# Altium PCB BaseCard.PcbDoc
Units mm, origin at the board's own origin, x right, y up, seen from the top; angles counter-clockwise.
Board outline 23 x 45 mm, 4 copper layers (Top Layer, Ground Plane, Power Plane, Bottom Layer), stack 0.844 mm thick; 2 components, 28 nets, 74 pads, 0 vias.
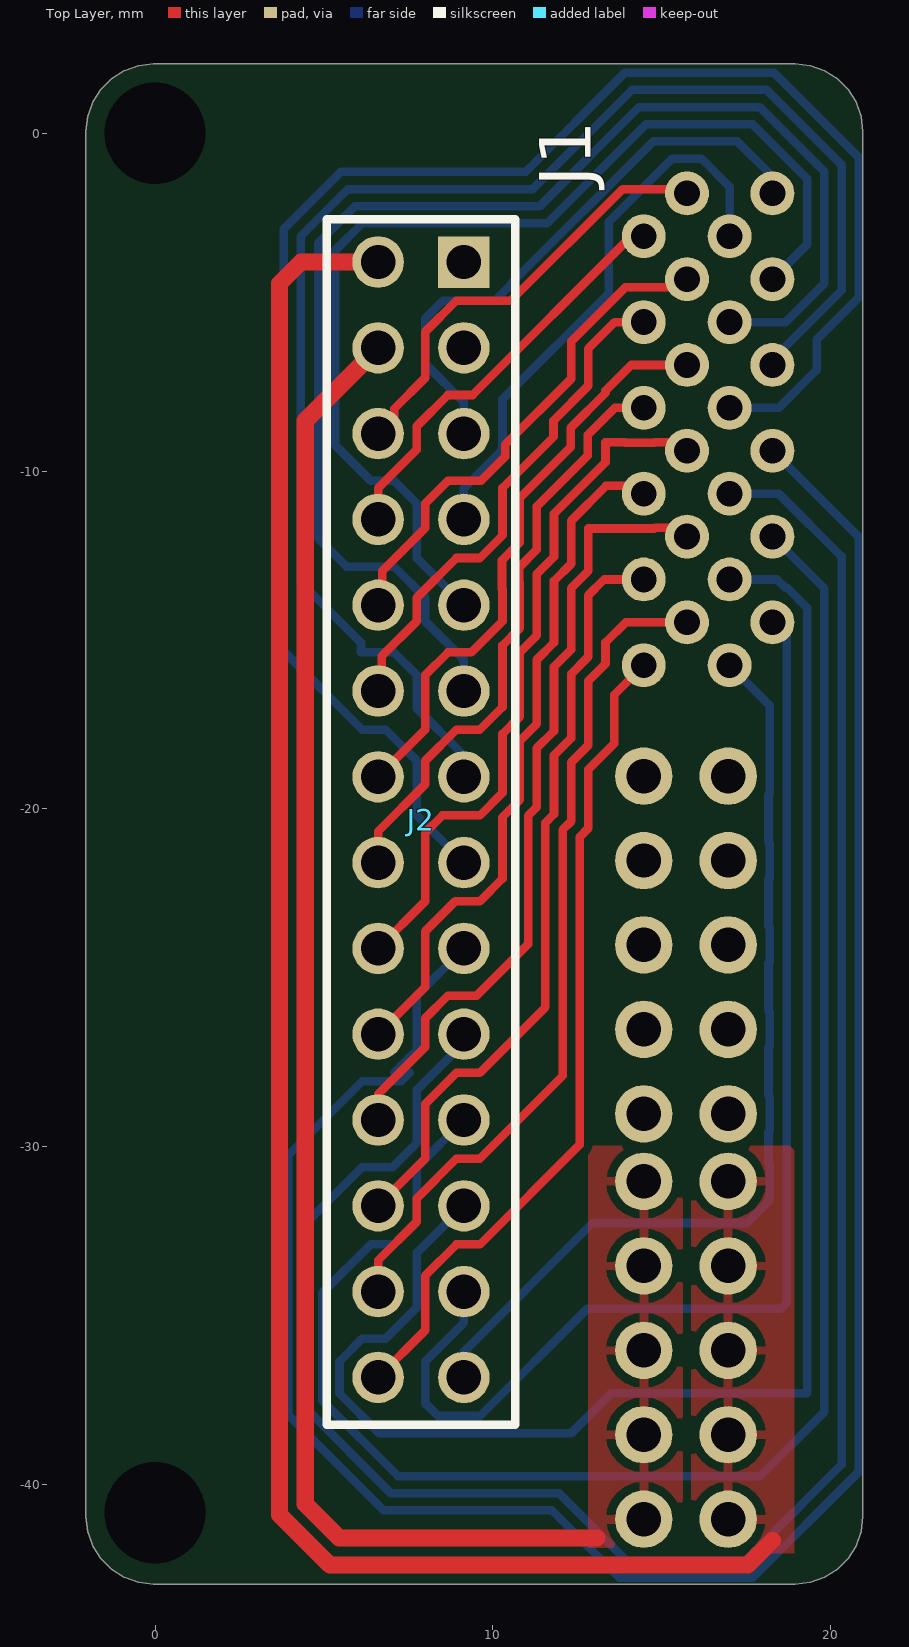
[diagram p0: Top Layer view]
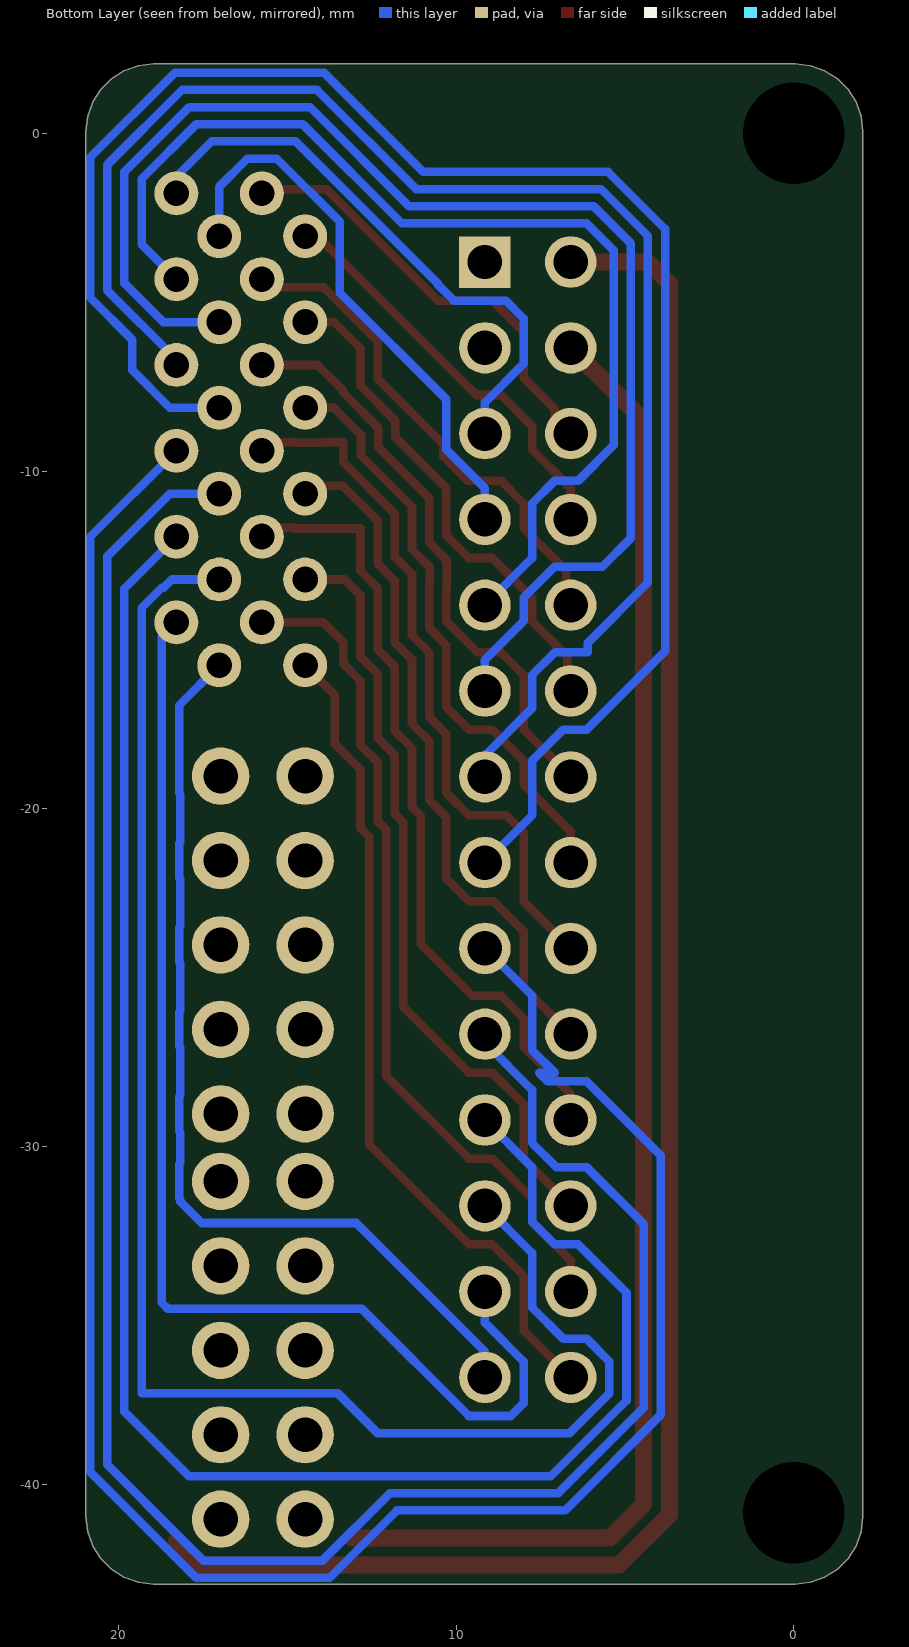
[diagram p1: Bottom Layer view, seen from below]
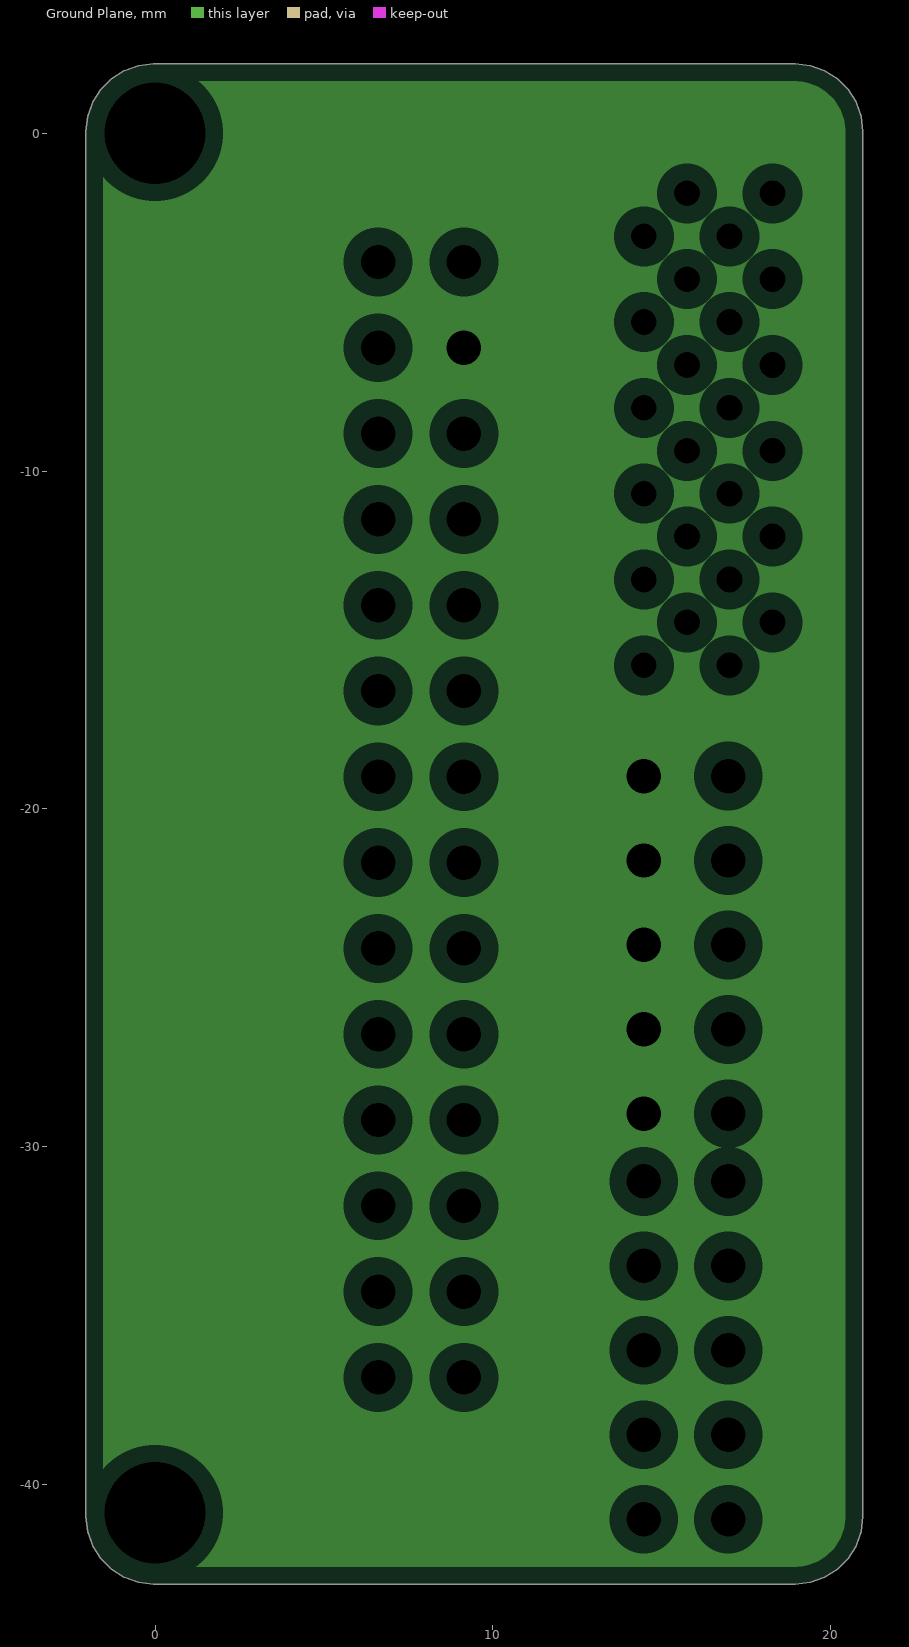
[diagram p2: Ground Plane, clearances drawn from the general rule]
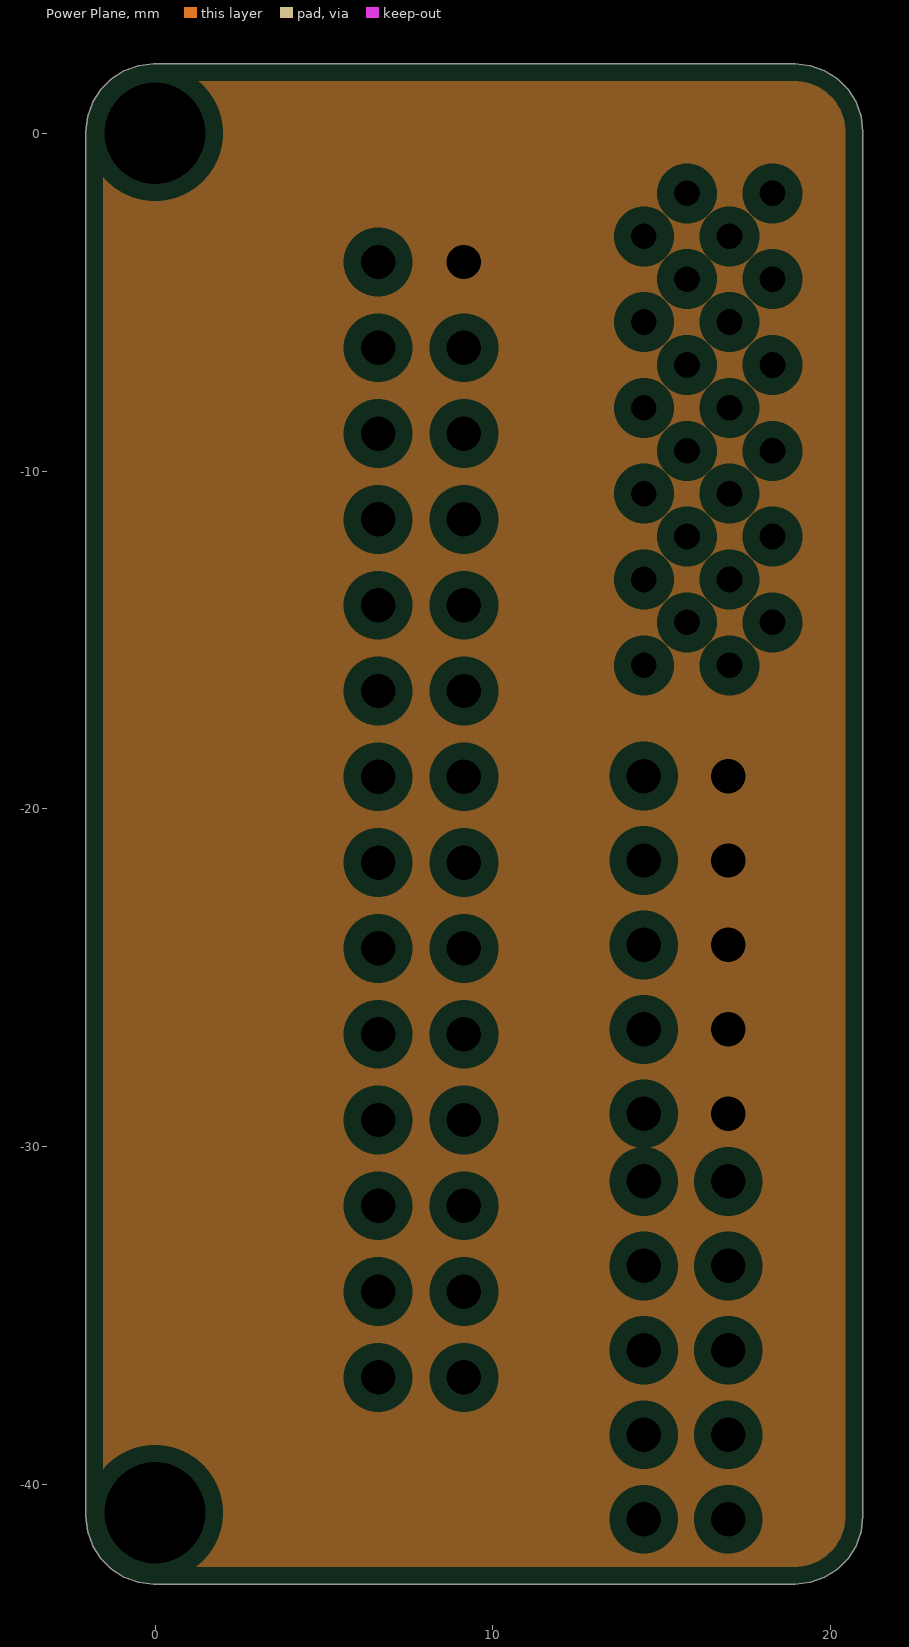
[diagram p3: Power Plane, clearances drawn from the general rule]

## Layer stack, top to bottom
Top Solder: solder mask 0.0102, Solder Resist, Dk 3.5
Top Layer: signal copper 0.0356
Dielectric 1: core 0.32, FR-4, Dk 4.8
Ground Plane: plane copper 0.036, net GND
Dielectric 3: prepreg 0.127, Dk 4.2
Power Plane: plane copper 0.036, net +12V
Dielectric 4: core 0.254, Dk 4.2
Bottom Layer: signal copper 0.0356
Bottom Solder: solder mask 0.0102, Solder Resist, Dk 3.5

## Board outline
-0.045,2.053 -0.49,2.003 -0.913,1.855 -1.292,1.617 -1.609,1.3 -1.847,0.921 -1.995,0.498 -2.045,0.053 -2.045,-40.947 -1.995,-41.392 -1.847,-41.815 -1.609,-42.194 -1.292,-42.511 -0.913,-42.749 -0.49,-42.897 -0.045,-42.947 18.955,-42.947 19.4,-42.897 19.823,-42.749 20.202,-42.511 20.519,-42.194 20.757,-41.815 20.905,-41.392 20.955,-40.947 20.955,0.053 20.905,0.498 20.757,0.921 20.519,1.3 20.202,1.617 19.823,1.855 19.4,2.003 18.955,2.053

## Design rules (kind name [scope] priority, off if disabled: settings)
Clearance [All] p1: gap=0.254 ignorepadtopadclearanceinfootprint=FALSE except(0: Arc-Hole Track-Hole SMDPad-Hole THPad-Hole Via-Hole Fill-Hole Poly-Hole Region-Hole Text-Hole)
PlaneClearance [All] p1: clearance=0.508
PlaneConnect [All] p1: planeconnectstyle=Relief reliefexpansion=0.508 reliefentries=4 reliefconductorwidth=0.254 reliefairgap=0.254
PolygonConnect [All] p1: connectstyle=Relief reliefconductorwidth=0.254 reliefentries=4 polygonreliefangle="90 Angle" airgapwidth=0.254
RoutingVias [All] p1: holewidth=0.711 width=1.27 viastyle="Through Hole" minholewidth=0.711 minwidth=1.27 maxholewidth=0.711 maxwidth=1.27
SolderMaskExpansion [All] p1: expansion=0.102
Width Power-lines [InNet('+3V3') or InNet('+5V')] p1: maxlimit=0.508 minlimit=0.508 preferedwidth=0.508
Width [All] p2: maxlimit=0.254 minlimit=0.254 preferedwidth=0.254
28 further rules are at their usual default settings.

## Components (designator, comment, footprint, x,y, rotation, side; value= is the part's Value field where it differs from the comment)
J1 "0459854142" CONN_HEADER_4PWR_24SGL_2.36MM 18.278,-1.778 r90 top
J2 "929745-01-14-I" Header_14x2_RA 9.144,-3.81 r270 top

## Footprints (in the part's own frame and the unit in brackets; to place one, negate y for a bottom-side part, rotate by r counter-clockwise, add the part's x,y. Pads: shape width x height; smd on the part's side, far side on the other; paste and mask are expansions set on the pad)
CONN_HEADER_4PWR_24SGL_2.36MM [mm]
  round 1.3 hole 0.76: 1(0,0) 2(-1.27,1.27) 3(-2.54,0) 4(-3.81,1.27) 5(-5.08,0) 6(-6.35,1.27) 7(-7.62,0) 8(-8.89,1.27) 9(-10.16,0) 10(-11.43,1.27) 11(-12.7,0) 12(-13.97,1.27) 13(0,2.53) 14(-1.27,3.81) 15(-2.54,2.53) 16(-3.81,3.81) 17(-5.08,2.53) 18(-6.35,3.81) 19(-7.62,2.53) 20(-8.89,3.81) 21(-10.16,2.53) 22(-11.43,3.81) 23(-12.7,2.53) 24(-13.97,3.81)
  round 1.7 hole 1.02: P1A(-27.25,1.31) P1A(-24.75,1.31) P1A(-22.25,1.31) P1A(-19.75,1.31) P1A(-17.25,1.31) P1B(-27.25,3.81) P1B(-24.75,3.81) P1B(-22.25,3.81) P1B(-19.75,3.81) P1B(-17.25,3.81) P2A(-39.25,1.31) P2A(-36.75,1.31) P2A(-34.25,1.31) P2A(-31.75,1.31) P2A(-29.25,1.31) P2B(-39.25,3.81) P2B(-36.75,3.81) P2B(-34.25,3.81) P2B(-31.75,3.81) P2B(-29.25,3.81)
  body extent -40.65,-11.41 3.13,4.87, height 7.49
Header_14x2_RA [mil] "28pos-connector"
  rect 60x60 hole 40.16: 1(0,0)
  round 60 hole 40.16: 2(100,0) 3(200,0) 4(300,0) 5(400,0) 6(500,0) 7(600,0) 8(700,0) 9(800,0) 10(900,0) 11(1000,0) 12(1100,0) 13(1200,0) 14(1300,0) 15(0,-100) 16(100,-100) 17(200,-100) 18(300,-100) 19(400,-100) 20(500,-100) 21(600,-100) 22(700,-100) 23(800,-100) 24(900,-100) 25(1000,-100) 26(1100,-100) 27(1200,-100) 28(1300,-100)
  silkscreen extent -50,-160 1355,60, body extent -50,-585 1350,15, height 226

## Part data
J1: Supplier Part Number 1=WM8736-ND, ComponentLink1Description="Manufacturer Link", ComponentLink1URL=http://www.molex.com/, ComponentLink2Description=Datasheet, ComponentLink2URL=http://www.molex.com/pdm_docs/sd/459854111_sd.pdf, Mounting Type="Through Hole", Number Of Positions=28, Number Of Rows=2, Part Number=0459854142, Supplier 1=Digi-Key
J2: Supplier Part Number 1=3M156384-28-ND, ComponentLink1Description="Manufacturer Link", ComponentLink1URL=https://www.3m.com/3M/en_US/interconnect-us/, ComponentLink2Description=Datasheet, ComponentLink2URL=http://multimedia.3m.com/mws/media/43897O/3mtmpinstriphdr-100-100x-100-929-series-ts0769.pdf, Mounting Type="Through Hole", Number Of Positions=28, Number Of Rows=2, Part Number=929745-01-14-I, Supplier 1=Digi-Key

## Free pads (board coordinates)
  round 1.524 hole 3: 1(0,0) 2(0,-40.836)

## Nets (pads, with @x,y where several pads share a name; then routed paths per layer and width w, separated by ;. In a path a pad name is that pad's centre, name@x,y a point inside that pad or via, vN(x,y) a via of type N, cw(c..) or ccw(c..) an arc to the next point about the centre after c; other vN are vias at no path point)
+3V3: J1.P2B J2.16 | length 44.2
  Top Layer w0.508: J2.16 4.445,-8.509 4.445,-40.578 5.451,-41.585 13.081,-41.585
+5V: J1.P2A J2.15 | length 55.1
  Top Layer w0.508: J2.15 4.318,-3.81 3.683,-4.445 3.683,-40.894 5.175,-42.386 17.548,-42.386 18.278,-41.656
+12V: J1.P1A J2.1
GND: J1.P1B J2.2
GPIO0: J1.19 J2.23 | length 20.8
  Top Layer w0.254: J2.23 8.001,-22.733 8.001,-20.701 8.509,-20.193 9.617,-20.193 10.287,-19.523 10.287,-17.78 10.795,-17.272 10.795,-15.372 11.303,-14.864 11.303,-13.043 11.811,-12.535 11.811,-11.259 13.335,-9.735 13.335,-9.144 13.909,-9.144 13.924,-9.159 14.778,-9.159 14.793,-9.144 15.377,-9.144 J1.19@15.631,-9.398
GPIO1: J1.20 J2.24 | length 20.8
  Top Layer w0.254: J2.24 8.001,-25.273 8.001,-23.622 8.89,-22.733 9.617,-22.733 10.287,-22.063 10.287,-20.242 10.795,-19.734 10.795,-17.99 11.303,-17.482 11.303,-15.583 11.811,-15.075 11.811,-13.253 12.319,-12.745 12.319,-11.47 13.35,-10.439 14.122,-10.439 14.351,-10.668 J1.20@14.351,-10.957
GPIO2: J1.21 J2.25 | length 23.5
  Top Layer w0.254: J2.25 6.604,-28.448 8.001,-27.051 8.001,-26.197 8.671,-25.527 9.525,-25.527 11.049,-24.003 11.049,-20.198 11.303,-19.944 11.303,-18.201 11.811,-17.693 11.811,-15.793 12.319,-15.285 12.319,-13.464 12.827,-12.956 12.827,-11.699 14.778,-11.699 14.796,-11.682 15.375,-11.682 J1.21@15.631,-11.938
GPIO3: J1.22 J2.26 | length 22.8
  Top Layer w0.254: J2.26 8.001,-30.353 8.001,-28.737 8.925,-27.813 9.617,-27.813 11.557,-25.873 11.557,-20.409 11.811,-20.155 11.811,-18.411 12.319,-17.903 12.319,-16.004 12.827,-15.496 12.827,-13.674 13.293,-13.208 J1.22@14.351,-13.208
GPIO4: J1.23 J2.27 | length 25
  Top Layer w0.254: J2.27 6.604,-33.366 7.747,-32.223 7.747,-31.531 8.925,-30.353 9.617,-30.353 12.065,-27.905 12.065,-20.619 12.319,-20.365 12.319,-18.622 12.827,-18.114 12.827,-16.214 13.335,-15.706 13.335,-15.075 13.932,-14.478 J1.23@15.631,-14.478
GPIO5: J1.24 J2.28 | length 24.7
  Top Layer w0.254: J2.28 8.001,-35.433 8.001,-33.817 8.925,-32.893 9.617,-32.893 12.573,-29.937 12.573,-20.83 12.827,-20.576 12.827,-18.832 13.589,-18.07 13.589,-16.627 J1.24
PWM8: J1.13 J2.17 | length 13
  Top Layer w0.254: J2.17 7.077,-8.417 7.077,-8.163 8.001,-7.239 8.001,-5.877 8.925,-4.953 10.541,-4.953 13.843,-1.651 15.504,-1.651 J1.13@15.631,-1.778
PWM9: J1.14 J2.18 | length 12.2
  Top Layer w0.254: J2.18 6.604,-10.506 7.747,-9.363 7.747,-8.671 8.671,-7.747 9.398,-7.747 14.097,-3.048 J1.14@14.351,-3.048
Rx1: J1.15 J2.19 | length 15.1
  Top Layer w0.254: J2.19 6.707,-13.867 J2.19@7.054,-14.215 ; J2.19@6.731,-13.663 6.731,-12.952 8.001,-11.682 8.001,-10.957 8.671,-10.287 9.652,-10.287 10.37,-9.569 10.37,-9.214 12.319,-7.265 12.319,-6.162 13.924,-4.557 15.392,-4.557 J1.15@15.631,-4.318
Rx2: J1.17 J2.21 | length 17.2
  Top Layer w0.254: J2.21 8.001,-17.653 8.001,-16.037 8.671,-15.367 9.363,-15.367 10.287,-14.443 10.287,-13.497 10.272,-13.482 10.272,-12.637 10.795,-12.114 10.795,-10.795 12.304,-9.286 12.304,-8.717 13.335,-7.686 13.335,-7.62 14.097,-6.858 J1.17@15.631,-6.858
SCL1: J1.2 J2.4 | length 17.1
  Top Layer w0.254: J1.2@16.891,-3.048 J1.2@16.891,-2.741
  Bottom Layer w0.254: J2.4 9.144,-10.506 10.287,-9.363 10.287,-7.874 13.437,-4.724 13.437,-2.621 15.311,-0.747 16.175,-0.747 17.008,-1.58 J1.2
SCL2: J1.4 J2.6 | length 39.9
  Bottom Layer w0.254: J2.6 9.144,-15.586 8.001,-14.443 8.001,-13.751 7.077,-12.827 5.666,-12.827 4.826,-11.987 4.826,-3.253 5.92,-2.159 11.39,-2.159 14.326,0.777 17.899,0.777 19.817,-1.141 19.817,-4.44 18.669,-5.588 J1.4
SDA1: J1.1 J2.3 | length 17.3
  Bottom Layer w0.254: J2.3 9.144,-7.966 8.001,-6.823 8.001,-5.478 8.526,-4.953 10.064,-4.953 10.541,-4.476 10.541,-4.445 14.747,-0.239 17.237,-0.239 18.278,-1.28 J1.1
SDA2: J1.3 J2.5 | length 32.1
  Bottom Layer w0.254: J2.5 7.747,-12.573 7.747,-10.957 7.077,-10.287 6.385,-10.287 5.334,-9.236 5.334,-3.464 6.131,-2.667 11.601,-2.667 14.537,0.269 17.689,0.269 19.309,-1.351 19.309,-3.287 J1.3
THR0: J1.5 J2.7 | length 44.1
  Bottom Layer w0.254: J2.7 9.144,-18.415 7.747,-17.018 7.747,-16.037 7.077,-15.367 6.096,-15.367 6.096,-15.078 4.318,-13.3 4.318,-3.043 5.71,-1.651 11.18,-1.651 14.116,1.285 18.11,1.285 20.325,-0.93 20.325,-4.65 18.278,-6.697 J1.5
THR1: J1.6 J2.8 | length 51.2
  Bottom Layer w0.254: J2.8 7.747,-20.193 7.747,-18.577 6.823,-17.653 6.131,-17.653 3.81,-15.332 3.81,-2.832 5.499,-1.143 10.969,-1.143 13.905,1.793 18.32,1.793 20.833,-0.72 20.833,-4.861 19.585,-6.108 19.585,-7.009 18.466,-8.128 J1.6
THR2: J1.7 J2.9 | length 68.8
  Bottom Layer w0.254: J2.9 7.747,-25.527 7.747,-27.143 7.077,-27.813 7.537,-27.813 7.283,-28.067 6.131,-28.067 3.937,-30.261 3.937,-37.935 6.769,-40.767 11.748,-40.767 13.748,-42.767 17.688,-42.767 20.833,-39.622 20.833,-11.953 J1.7
THR3: J1.8 J2.10 | length 63.4
  Bottom Layer w0.254: J2.10 9.144,-26.924 7.747,-28.321 7.747,-29.889 7.029,-30.607 6.131,-30.607 4.445,-32.293 4.445,-37.724 6.98,-40.259 11.958,-40.259 13.958,-42.259 17.478,-42.259 18.057,-41.679 20.325,-39.412 20.325,-12.527 18.466,-10.668 J1.8
THR4: J1.9 J2.11 | length 53.6
  Bottom Layer w0.254: J2.11 7.747,-30.607 7.747,-32.223 7.077,-32.893 6.385,-32.893 4.953,-34.325 4.953,-37.514 7.19,-39.751 12.169,-39.751 12.177,-39.759 17.906,-39.759 19.817,-37.848 19.817,-13.477 J1.9
THR5: J1.10 J2.12 | length 48.2
  Bottom Layer w0.254: J2.12 7.747,-33.147 7.747,-34.763 6.823,-35.687 6.131,-35.687 5.461,-36.357 5.461,-37.303 6.639,-38.481 12.319,-38.481 13.503,-37.297 14.978,-37.297 14.984,-37.303 16.452,-37.303 16.458,-37.297 17.478,-37.297 17.484,-37.303 19.309,-37.303 19.309,-14.051 18.705,-13.447 18.654,-13.447 18.415,-13.208 J1.10
THR6: J1.11 J2.13 | length 36.4
  Bottom Layer w0.254: J2.13 9.144,-35.214 8.001,-36.357 8.001,-37.592 8.382,-37.973 9.617,-37.973 12.793,-34.797 18.196,-34.797 18.197,-34.798 18.534,-34.798 18.707,-34.625 18.707,-14.907 J1.11
THR7: J1.12 J2.14 | length 28.2
  Bottom Layer w0.254: J2.14 9.144,-36.068 12.953,-32.259 17.525,-32.259 18.161,-31.623 18.161,-31.576 18.199,-31.538 18.199,-30.518 18.161,-30.48 18.161,-29.576 18.199,-29.538 18.199,-28.518 18.161,-28.48 18.161,-27.076 18.199,-27.038 18.199,-26.018 18.161,-25.98 18.161,-24.576 18.199,-24.538 18.199,-23.518 18.161,-23.48 18.161,-22.076 18.199,-22.038 18.199,-21.018 18.161,-20.98 18.161,-19.576 18.199,-19.538 18.199,-16.939 J1.12
Tx1: J1.16 J2.20 | length 15
  Top Layer w0.254: J2.20 6.707,-16.407 6.707,-15.484 7.747,-14.443 7.747,-13.751 8.925,-12.573 9.617,-12.573 10.287,-11.903 10.287,-10.497 11.796,-8.988 11.796,-8.507 12.827,-7.476 12.827,-6.372 13.611,-5.588 J1.16@14.351,-5.588
Tx2: J1.18 J2.22 | length 17.8
  Top Layer w0.254: J2.22@6.413,-21.78 J2.22 6.604,-20.666 8.001,-19.269 8.001,-18.577 8.925,-17.653 9.617,-17.653 10.287,-16.983 10.287,-15.162 10.795,-14.654 10.795,-13.286 10.78,-13.271 10.78,-12.847 11.303,-12.324 11.303,-11.049 12.812,-9.54 12.812,-8.927 13.611,-8.128 J1.18@14.351,-8.128

## Polygon pours and split planes (outlines as drawn)
+3V3 on Top Layer "+3V3" (solid, pour order 8): 12.827,-29.972 15.586,-29.972 15.621,-29.937 15.621,-41.91 12.827,-41.91
+5V on Top Layer "+5V" (solid, pour order 4): 15.875,-29.972 18.796,-29.972 18.923,-30.099 18.923,-42.037 15.875,-42.037
GND on Ground Plane (split plane): 19.286,1.502 19.6,1.392 19.882,1.215 20.117,0.98 20.294,0.698 20.404,0.384 20.445,0.024 20.445,-40.918 20.404,-41.278 20.294,-41.592 20.117,-41.874 19.882,-42.109 19.6,-42.286 19.286,-42.396 18.926,-42.437 -0.016,-42.437 -0.376,-42.396 -0.69,-42.286 -0.972,-42.109 -1.207,-41.874 -1.384,-41.592 -1.494,-41.278 -1.535,-40.918 -1.535,0.024 -1.494,0.384 -1.384,0.698 -1.207,0.98 -0.972,1.215 -0.69,1.392 -0.376,1.502 -0.016,1.543 18.926,1.543
+12V on Power Plane (split plane): 19.286,1.502 19.6,1.392 19.882,1.215 20.117,0.98 20.294,0.698 20.404,0.384 20.445,0.024 20.445,-40.918 20.404,-41.278 20.294,-41.592 20.117,-41.874 19.882,-42.109 19.6,-42.286 19.286,-42.396 18.926,-42.437 -0.016,-42.437 -0.376,-42.396 -0.69,-42.286 -0.972,-42.109 -1.207,-41.874 -1.384,-41.592 -1.494,-41.278 -1.535,-40.918 -1.535,0.024 -1.494,0.384 -1.384,0.698 -1.207,0.98 -0.972,1.215 -0.69,1.392 -0.376,1.502 -0.016,1.543 18.926,1.543